# Altium PCB YB03CQ81552-(U).PcbDoc
Units mm, origin at the board's own origin, x right, y up, seen from the top; angles counter-clockwise.
Board outline 53 x 50 mm, 2 copper layers (Top Layer, Bottom Layer); 62 components, 79 nets, 283 pads, 106 vias.
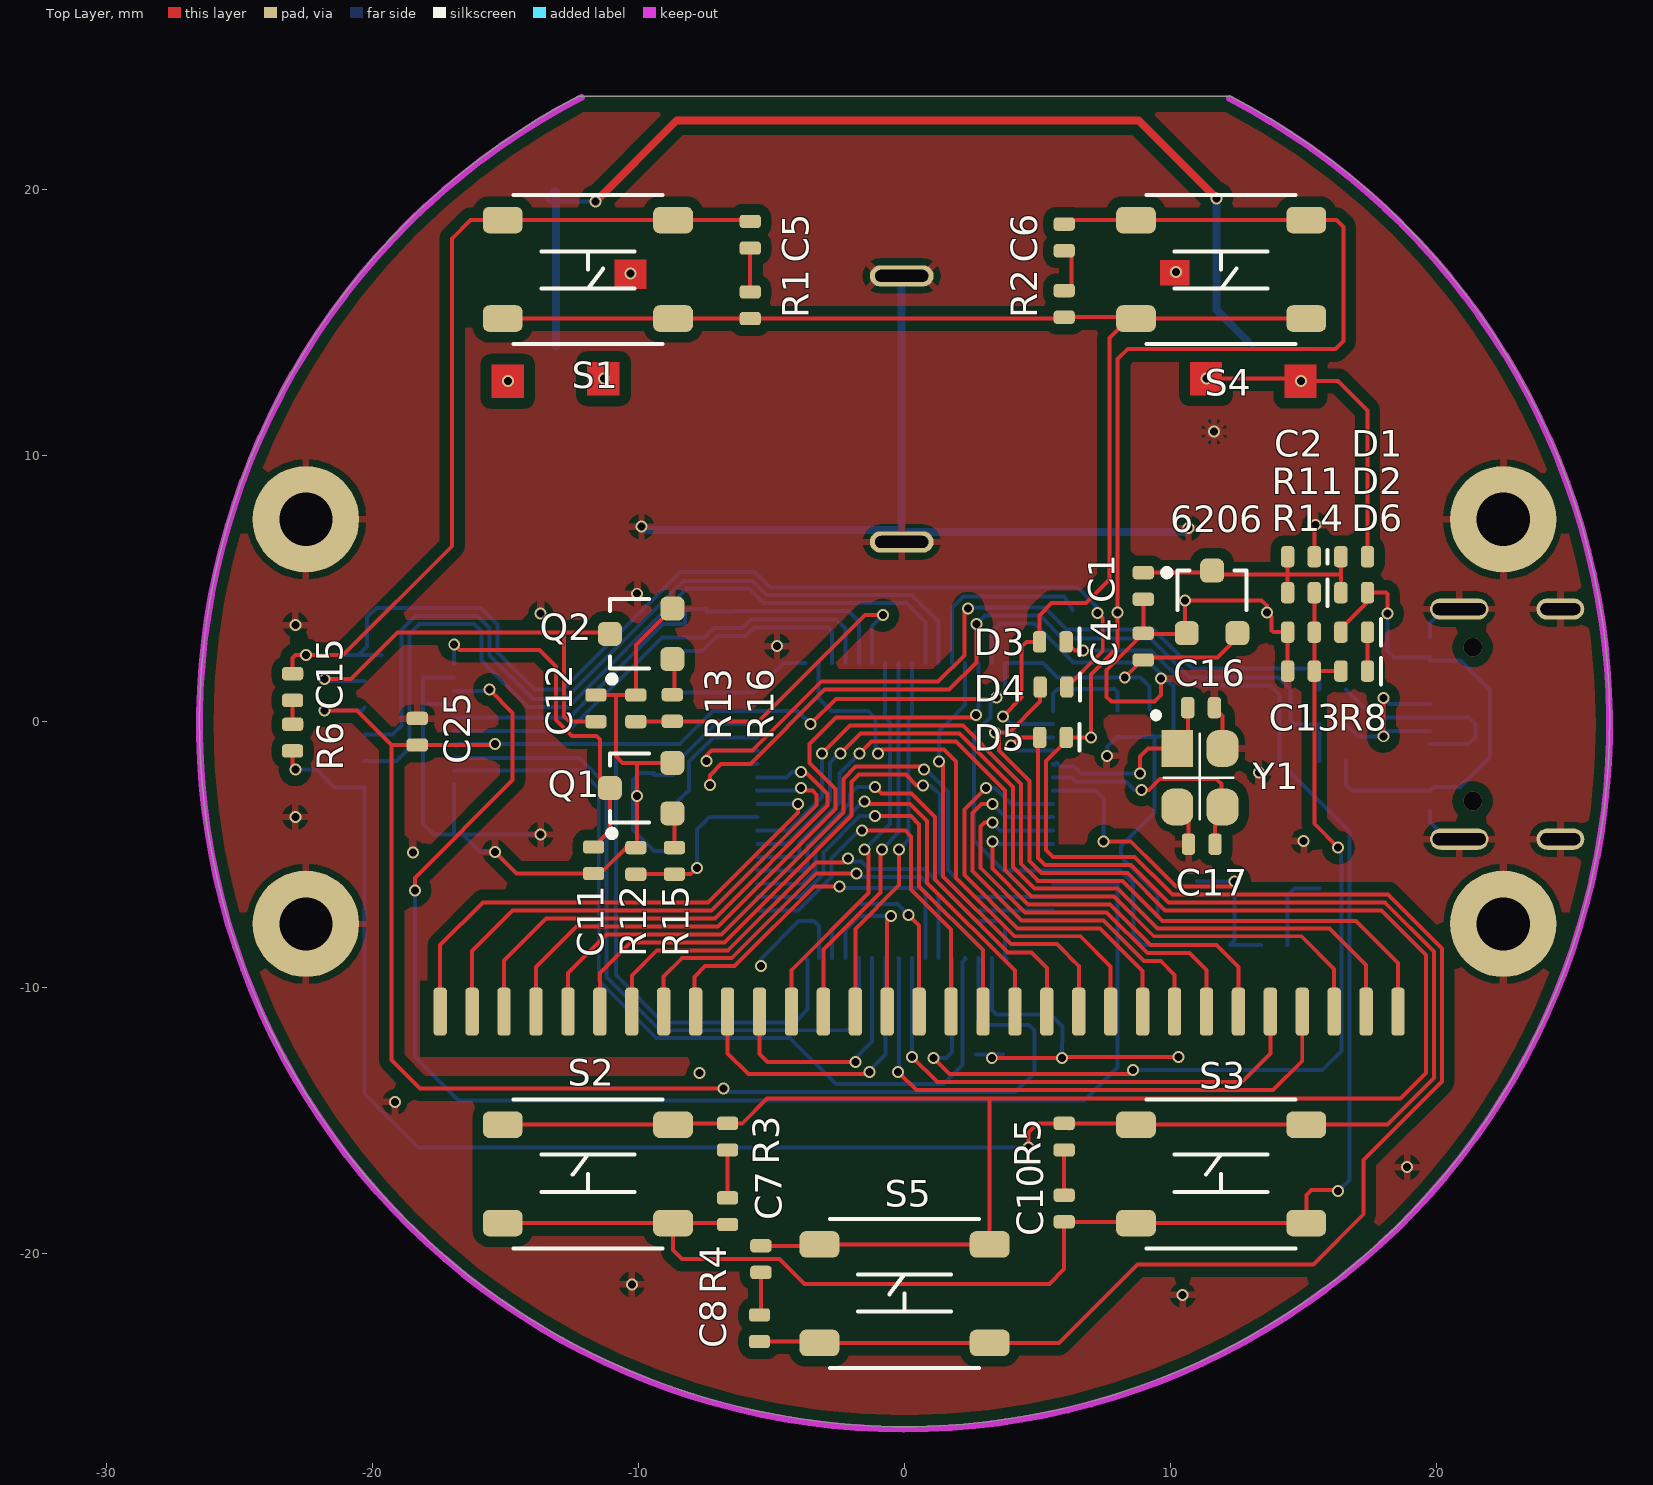
[diagram p0: Top Layer view]
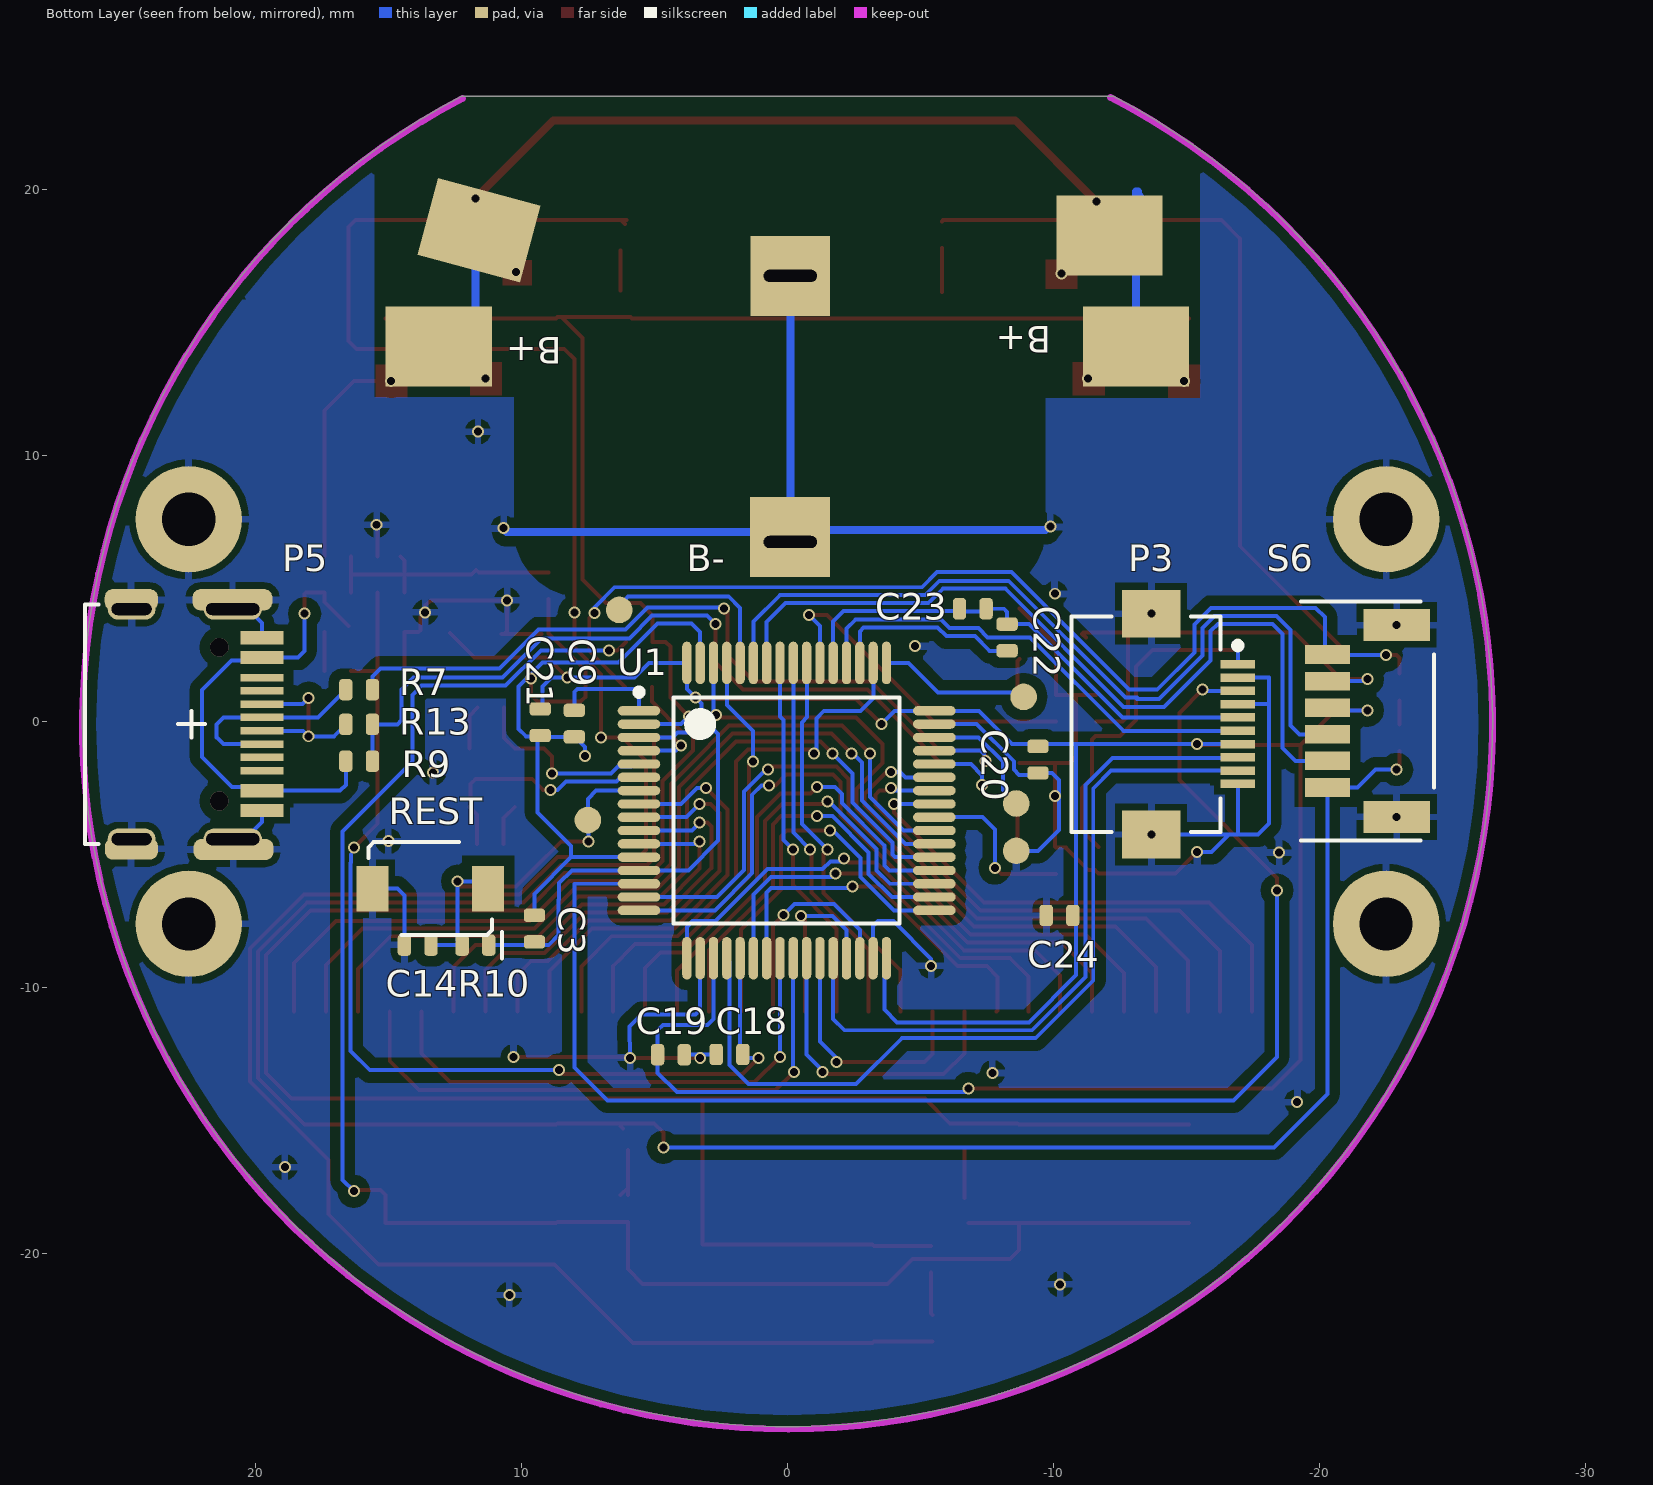
[diagram p1: Bottom Layer view, seen from below]

## Layer stack, top to bottom
Top Solder: solder mask 0.0102, Solder Resist, Dk 3.5
Top Layer: signal copper 0.0356
Dielectric 1: dielectric 0.32, FR-4, Dk 4.8
Bottom Layer: signal copper 0.0356
Bottom Solder: solder mask 0.0102, Solder Resist, Dk 3.5

## Board outline
-12.247,23.5 ccw(c0,0) 12.247,23.5

## Design rules (kind name [scope] priority, off if disabled: settings)
Clearance Clearance_1 [InNamedPolygon('Bottom Layer-GND') Or  InNamedPolygon('Bottom Layer-GND 1')] p1: gap=0.4 ignorepadtopadclearanceinfootprint=FALSE
Clearance [All] p2: gap=0.15 ignorepadtopadclearanceinfootprint=FALSE
PolygonConnect PolygonConnect_1 [All vs IsNamedPolygon('Bottom Layer-GND')] p1: connectstyle=Relief reliefconductorwidth=0.254 reliefentries=4 polygonreliefangle="45 Angle" airgapwidth=0.254
PolygonConnect [All] p2: connectstyle=Relief reliefconductorwidth=0.254 reliefentries=4 polygonreliefangle="90 Angle" airgapwidth=0.254
RoutingVias [All] p1: holewidth=0.711 width=1.27 viastyle="Through Hole" minholewidth=0.711 minwidth=1.27 maxholewidth=0.711 maxwidth=1.27
SolderMaskExpansion [All] p1: expansion=0.102
UnRoutedNet [All] p1: checkbadconnections=TRUE
Width [All] p1: maxlimit=2 minlimit=0.127 preferedwidth=0.15 checkconnectedcopper=TRUE
29 further rules are at their usual default settings.

## Components (designator, comment, footprint, x,y, rotation, side; value= is the part's Value field where it differs from the comment)
6206 "6206" sot-23 11.557,4.5 r0 top
C1 "Cap" S0402#1 8.972,5.1 r270 top value=.47
C2 "Cap" S0402#1 14.9,6.199 r180 top value=0.01
C3 "Cap" S0402#1 9.511,-7.778 r90 bottom value=0.01
C4 "Cap" S0402#1 8.972,2.82 r90 top value=0.47
C5 "Cap" S0402#1 -5.8,18.3 r90 top value=0.01
C6 "Cap" S0402#1 6,18.2 r90 top value=0.01
C7 "Cap" S0402#1 -6.652,-18.4 r270 top value=0.01
C8 "Cap" S0402#1 -5.452,-22.8 r270 top value=0.01
C9 "Cap" S0402#1 8.012,-0.074 r90 bottom value=.47
C10 "Cap" S0402#1 6,-18.3 r270 top value=0.01
C11 "Cap" S0402#1 -11.687,-5.211 r270 top value=0.01
C12 "Cap" S0402#1 -11.6,0.5 r90 top value=0.01
C13 "Cap" S0402#1 14.9,1.899 r180 top value=0.01
C14 "Cap" S0402#1 13.9,-8.4 r0 bottom value=0.1
C15 "Cap" S0402#1 -23,1.3 r90 top value=0.01
C16 "Cap" S0402#2 11.146,0.523 r0 top value=18P
C17 "Cap" S0402#1 11.171,-4.605 r180 top value=18P
C18 "Cap" S0402#1 2.178,-12.508 r180 bottom value=0.01
C19 "Cap" S0402#1 4.38,-12.52 r180 bottom value=0.01
C20 "Cap" S0402#1 -9.413,-1.43 r270 bottom value=0.01
C21 "Cap" S0402#1 9.295,-0.024 r90 bottom value=0.01
C22 "Cap" S0402#1 -8.256,3.164 r270 bottom value=0.01
C23 "Cap" S0402#1 -6.966,4.243 r0 bottom value=0.01
C24 "Cap" S0402#1 -10.225,-7.284 r0 bottom value=0.01
C25 "Cap" S0402#1 -18.316,-0.378 r270 top value=0.01 (schematic designator C7)
D1 "Diode 1N4148" D0603 16.9,6.199 r0 top
D2 "Diode 1N4148" D0603 16.9,4.845 r0 top
D3 "Diode" D0603 5.574,3 r180 top
D4 "Diode" D0603 5.6,1.3 r180 top
D5 "Diode" D0603 5.58,-0.593 r180 top
D6 "Diode" D0603 16.9,3.362 r180 top
P3 "Header 10" FH12-10S-0.5SH -15.3,-0.093 r270 bottom locked
P5 "Header 4" TYPE_C_16P_HK 22.4,-0.093 r180 bottom
Q1 "MOSFET-N" sot-23 -9.9,-2.5 r90 top
Q2 "MOSFET-N" sot-23 -9.9,3.3 r90 top
R1 "Res1" S0402#1 -5.8,15.65 r270 top value=10K
R2 "Res1" S0402#1 6,15.7 r270 top value=10K
R3 "Res1" S0402#1 -6.652,-15.6 r90 top value=10K
R4 "Res1" S0402#1 -5.4,-20.2 r90 top value=10K
R5 "Res1" S0402#1 6,-15.6 r90 top value=10K
R6 "Res1" S0402#1 -23,-0.6 r270 top value=10K
R7 "Res1" S0402#1 16.1,1.2 r180 bottom value=22R
R8 "Res1" S0402#1 16.9,1.899 r180 top value=1M
R9 "Res1" S0402#1 16.1,-1.488 r180 bottom value=2k
R10 "Res1" S0402#1 11.728,-8.4 r0 bottom value=10K
R11 "Res1" S0402#1 14.9,4.845 r0 top value=1M
R12 "Res1" S0402#1 -10.1,-5.236 r90 top value=10K
R13 "Res1" S0402#1 -10.1,0.5 r90 top value=10K
R13 "Res1" S0402#1 16.1,-0.1 r180 bottom value=22R
R14 "Res1" S0402#1 14.9,3.362 r180 top value=1M
R15 "Res1" S0402#1 -8.65,-5.236 r270 top value=100
R16 "Res1" S0402#1 -8.727,0.512 r270 top value=100
REST "Comment" 3*4*2KEY 11.25,-6.278 r0 bottom
S1 "TOL" 4*4*1 -11.9,17 r0 top
S2 "IN/MM(UP)" 4*4*1 -11.9,-17 r180 top locked
S3 "ABS/SET(DOWN)" 4*4*1 11.9,-17 r180 top locked
S4 "M" 4*4*1 11.9,17 r0 top
S5 "OFF/ZERO" 4*4*1 0,-21.5 r180 top locked
S6 "ABS_ZERO" SH1.0L-6P -20.3,2.523 r270 bottom locked
U1 "STM32L152RCT6" STM-LQFP64_N 0.03,-3.343 r180 bottom locked
Y1 "XTAL" "3225 4P XAL" 10.25,-1.01 r270 top locked

## Footprints (in the part's own frame and the unit in brackets; to place one, negate y for a bottom-side part, rotate by r counter-clockwise, add the part's x,y. Pads: shape width x height; smd on the part's side, far side on the other; paste and mask are expansions set on the pad)
3*4*2KEY [mm]
  rect 1.2x1.7 smd paste-0.2: 1(0,0) 2(4.35,0)
  silkscreen extent -0.15,-1.75 4.5,1.75
4*4*1 [mm]
  rrect50% 1.5x1 smd paste-0.15 mask+0.102: 1(-3.2,1.85) 1(3.2,1.85) 2(-3.2,-1.85) 2(3.2,-1.85)
  silkscreen extent -2.8,-2.8 2.8,2.8
"3225 4P XAL" [mm]
  rect 1.4x1.2 smd paste-0.15 mask+0.102: 1(0,0)
  rrect75% 1.4x1.2 smd paste-0.15 mask+0.102: 2(2.2,1.7) GND(0,1.7) GND(2.2,0)
  silkscreen extent -1.35,-0.9 2.65,2.1
D0603 [mm]
  rrect50% 0.5x0.8 smd paste-0.08: 1(0.5,0) 2(-0.5,0)
  silkscreen extent -1,-0.25 -1,0.25, body extent -0.55,-0.3 0.55,0.3, height 1.3
FH12-10S-0.5SH [mm] "Connector; FH12 Series; 10 Position; 0.5mm Spaced Bottom Contact"
  rect 0.32x1.3 smd paste-0.05: 1(-2.25,1.625) 2(-1.75,1.625) 3(-1.25,1.625) 4(-0.75,1.625) 5(-0.25,1.625) 6(0.25,1.625) 7(0.75,1.625) 8(1.25,1.625) 9(1.75,1.625) 10(2.25,1.625)
  rect 1.8x2.2 smd paste-0.2: 11(-4.15,-1.625) 12(4.15,-1.625)
  silkscreen extent -4.05,-4.63 4.05,1.75
S0402#1 [mm]
  rrect50% 0.5x0.8 smd paste-0.08: 1(0.5,0) 2(-0.5,0)
  body extent -0.55,-0.3 0.55,0.3, height 1.3
S0402#2 [mm]
  rrect50% 0.5x0.8 smd paste-0.08: 1(0.5,0)
  rrect50% 0.5x0.8 smd paste-0.15: 2(-0.5,0)
  body extent -0.55,-0.3 0.55,0.3, height 1.3
SH1.0L-6P [mm]
  rect 0.7x1.7 smd paste-0.1 mask+0: 1(0,0) 2(1,0) 3(2,0) 4(3,0) 5(4,0) 6(5,0)
  rect 1.2x2.5 smd paste-0.2 mask+0: G(-1.11,2.6) G(6.11,2.6)
  silkscreen extent -2,-1 7,4
sot-23 [mm] "SOT-23; 3 Leads; Body 3.0 x 2.5 mm, inc. leads (LxW max), Alternate Lead Configuration"
  rrect50% 0.9x0.9 smd paste-0.1: 1(0,1.175) 2(-0.95,-1.175) 3(0.95,-1.175)
  silkscreen extent -1.82,-0.3 1.3,1.22
STM-LQFP64_N [mm] "Thin QFP, 64-Leads, Body 10x10mm, Pitch 0.5mm, IPC Medium Density"
  oval 1.6x0.35 smd paste-0.08 mask+0.064: 1(-5.55,3.75) 2(-5.55,3.25) 3(-5.55,2.75) 4(-5.55,2.25) 6(-5.55,1.25) 7(-5.55,0.75) 8(-5.55,0.25) 9(-5.55,-0.25) 10(-5.55,-0.75) 11(-5.55,-1.25) 12(-5.55,-1.75) 13(-5.55,-2.25) 14(-5.55,-2.75) 15(-5.55,-3.25) 16(-5.55,-3.75) 33(5.55,-3.75) 34(5.55,-3.25) 35(5.55,-2.75) 36(5.55,-2.25) 37(5.55,-1.75) 38(5.55,-1.25) 39(5.55,-0.75) 40(5.55,-0.25) 41(5.55,0.25) 42(5.55,0.75) 43(5.55,1.25) 44(5.55,1.75) 45(5.55,2.25) 46(5.55,2.75) 47(5.55,3.25) 48(5.55,3.75)
  oval 1.6x0.35 smd paste-0.15 mask+0.064: 5(-5.55,1.75)
  oval 0.35x1.6 smd paste-0.08 mask+0.064: 17(-3.75,-5.55) 18(-3.25,-5.55) 19(-2.75,-5.55) 20(-2.25,-5.55) 21(-1.75,-5.55) 22(-1.25,-5.55) 23(-0.75,-5.55) 24(-0.25,-5.55) 25(0.25,-5.55) 26(0.75,-5.55) 27(1.25,-5.55) 28(1.75,-5.55) 29(2.25,-5.55) 30(2.75,-5.55) 31(3.25,-5.55) 32(3.75,-5.55) 49(3.75,5.55) 50(3.25,5.55) 51(2.75,5.55) 52(2.25,5.55) 53(1.75,5.55) 54(1.25,5.55) 55(0.75,5.55) 56(0.25,5.55) 57(-0.25,5.55) 58(-0.75,5.55) 59(-1.25,5.55) 60(-1.75,5.55) 61(-2.25,5.55) 62(-2.75,5.55) 63(-3.25,5.55) 64(-3.75,5.55)
  silkscreen extent -5.68,-4.25 4.25,4.57, body extent -5,-5 5,5, height 1.6
TYPE_C_16P_HK [mm] "汉科16P"
  rrect75% 2x0.8 smd paste+0 mask+0.102: 200(-2.263,4.671) 200(-2.26,-4.691)
  rrect75% 3x0.8 smd paste+0 mask+0.102: 200(1.538,4.671) 200(1.581,-4.709)
  rect 1.6x0.5 smd paste-0.1 mask+0.064: A1B12(2.65,3.25) A4B9(2.65,2.5) B4A9(2.65,-2.5)
  rect 1.6x0.28 smd paste-0.05 mask+0.064: A5(2.65,1.25) A6(2.65,0.25) A7(2.65,-0.25) A8(2.65,-1.25) B5(2.65,-1.75) B6(2.65,-0.75) B7(2.65,0.75) B8(2.65,1.75)
  rect 1.6x0.5 smd paste-0.1: B1A12(2.65,-3.25)
  oval 1.8x0.8 hole 0.45 slot 1.5 at 0 deg paste+0 mask+0.102: GND(-2.25,4.325) GND(-2.25,-4.325)
  oval 2.2x0.8 hole 0.45 slot 2 at 0 deg paste+0 mask+0.102: GND(1.55,4.325) GND(1.55,-4.325)
  silkscreen extent -4,-4.5 0.5,4.5

## Part data
6206: library part 2606
C1 C2 C3 C4 C5 C6 C7 C8 C9 C10 C11 C12 C13 C14 C15 C16 C17 C18 C19 C20 C21 C22 C23 C24 C25: "Capacitor", LatestRevisionDate=17-Jul-2002, LatestRevisionNote="Re-released for DXP Platform.", PackageDescription="Radial Cap, Thru-Hole; 2 Leads; 0.3 in Pin Spacing", PackageReference=RAD-0.3, Published=8-Jun-2000, Publisher="Altium Limited"
D1 D2: "High Conductance Fast Diode", Code_JEDEC=DO-204-AH, ComponentLink1Description="Manufacturer Link", ComponentLink1URL=http://www.fairchildsemi.com/, ComponentLink2Description=Datasheet, ComponentLink2URL=http://www.fairchildsemi.com/ds/1N%2F1N4148.pdf, DatasheetVersion=1997, LatestRevisionDate=17-Jul-2002, LatestRevisionNote="Re-released for DXP Platform.", PackageDescription="Diode, Axial; Body 3.8 x 1.9 mm (LxDia. max), Lead Dia. 0.53 mm (max)", PackageReference=DO-35, Published=8-Jun-2000, Publisher="Altium Limited"
D3 D4 D5 D6: "Default Diode", Code_JEDEC=DO-214-AB, LatestRevisionDate=17-Jul-2002, LatestRevisionNote="Re-released for DXP Platform.", PackageDescription="DO-214-AB/SMC; 2 C-Bend Leads; Body 7.9 x 5.9 mm, inc. leads (LxW)", PackageReference=SMC, PackageVersion=Sep-1996, Published=8-Jun-2000, Publisher="Altium Limited"
P3: "Header, 10-Pin", LatestRevisionDate=17-Jul-2002, LatestRevisionNote="Re-released for DXP Platform.", Publisher="Altium Limited"
P5: "Header, 4-Pin", LatestRevisionDate=17-Jul-2002, LatestRevisionNote="Re-released for DXP Platform.", Publisher="Altium Limited"
Q1 Q2: "N-Channel MOSFET", LatestRevisionDate=17-Jul-2002, LatestRevisionNote="Re-released for DXP Platform.", PackageDescription="TO, Flat Index; 3 In-Line, Axial Leads; Body Dia. 4.6mm; Lead Dia. 0.5 mm (max)", PackageReference=E3, PackageVersion=1995/1996, Published=8-Jun-2000, Publisher="Altium Limited"
R1 R2 R3 R4 R5 R6 R7 R8 R9 R10 R11 R12 R13 R13 R14 R15 R16: "Resistor", LatestRevisionDate=17-Jul-2002, LatestRevisionNote="Re-released for DXP Platform.", PackageDescription="Axial Device, Thru-Hole; 2 Leads; 0.3 in Pin Spacing", PackageReference=AXIAL-0.3, Published=8-Jun-2000, Publisher="Altium Limited"
S1 S2 S3 S4 S5: library part SW-PB, "Switch", LatestRevisionDate=17-Jul-2002, LatestRevisionNote="Re-released for DXP Platform.", PackageDescription="Switch; 2 Leads", PackageReference=SPST-2, Published=24-Mar-1999, Publisher="Altium Limited"
S6: library part SW-SPST, "Single-Pole, Single-Throw Switch", LatestRevisionDate=17-Jul-2002, LatestRevisionNote="Re-released for DXP Platform.", PackageDescription="Switch; 2 Leads", PackageReference=SPST-2, Published=24-Mar-1999, Publisher="Altium Limited"
U1: "ARM Cortex-M3 32-bit MCU, 256 KB Flash, 32 KB Internal RAM, 51 I/Os, 64-pin LQFP, -40 to 85 degC, Tray", I/Os (High Current)=51, Manufacturer=STMicroelectronics, Operating Frequency(F) (Processor speed) (MHz)=32, Supply Voltage(Vcc) min (V)=1.65, ComponentLink1Description="Manufacturer URL", ComponentLink1URL=http://www.st.com/web/en/home.html, ComponentLink2Description=Datasheet, ComponentLink2URL=http://www.st.com/st-web-ui/static/active/en/resource/technical/document/datasheet/DM00048356.pdf, ComponentLink3Description="Package Specification", ComponentLink3URL=http://www.st.com/st-web-ui/static/active/en/resource/technical/document/datasheet/DM00037051.pdf, Core="ARM Cortex-M3", D/A Converter="2x12-bit (2 Channel)", Data E2PROM nom (B)=8192, DatasheetVersion="Rev. 3", Display controller="LCD 4x32/8x28", FLASH Size (Prog) (kB)=256, Internal RAM Size (kB)=32, Mounting Technology="Surface Mount", PackageDescription="64-Pin Low Profile Quad Flat Package, 10 x 10 mm Body, 0.5 mm Pitch", PackageReference=LQFP64, PackageVersion="Rev. 4, 06/2013", Packing=Tray, PartNumber=STM32L152RCT6
Y1: "Crystal Oscillator", LatestRevisionDate=17-Jul-2002, LatestRevisionNote="Re-released for DXP Platform.", PackageDescription="Crystal, Thru-Hole; 2 Leads; Body 3.1 x 8.2 mm (Dia.xH)", PackageReference=R38, Published=8-Jun-2000, Publisher="Altium Limited"

## Free pads (board coordinates)
  rect 4x3 smd far side paste-0.3 mask+0.102: 2(-13.1,14.1) 2(-12.105,18.272) 2(13.1,14.1)
  rect 3x3 smd far side paste-2 mask+0.102: 2(-0.107,16.752) 2(-0.094,6.937)
  rect 3x4 smd far side rot 105 paste-0.3 mask+0.102: 2(11.591,18.47)
  round 4 hole 2 mask+0.102: 3(-22.5,7.603) 3(22.5,7.603) 6(22.5,-7.603)
  round 4 hole 2 paste-2 mask+0.102: 4(-22.5,-7.603)
  round 1 smd far side paste-2 mask+0.102: 8(7.5,-3.7) 9(-8.6,-4.858) 10(-8.6,-3.078) 11(-8.875,0.928) 12(6.321,4.199)
  oval 2.4x0.8 hole 0.45 slot 2 at 0 deg mask+0.102: 13(-0.107,6.752) 13(-0.107,16.752)
  rrect50% 0.5x1.8 smd paste-2 mask+0.102: COM0(-17.452,-10.9) COM1(-16.252,-10.9) COM2(-15.052,-10.9) COM3(-13.852,-10.9) S01(-12.652,-10.9) S01(-11.452,-10.9) S02(-10.252,-10.9) S03(-9.052,-10.9) S04(-7.852,-10.9) S05(-6.652,-10.9) S06(-5.452,-10.9) S07(-4.252,-10.9) S08(-3.052,-10.9) S09(-1.852,-10.9) S10(-0.652,-10.9) S11(0.548,-10.9) S12(1.748,-10.9) S13(2.948,-10.9) S14(4.148,-10.9) S15(5.348,-10.9) S16(6.548,-10.9) S17(7.748,-10.9) S18(8.948,-10.9) S19(10.148,-10.9) S20(11.348,-10.9) S21(12.548,-10.9) S22(13.748,-10.9) S23(14.948,-10.9) S24(16.148,-10.9) S25(17.348,-10.9) S26(18.548,-10.9)

## Via types
v1: diameter 0.45, hole 0.3, Top Layer to Bottom Layer, 104 vias
v2: diameter 0.7, hole 0.7, Top Layer to Bottom Layer, tented both sides, 2 vias

## Nets (pads, with @x,y where several pads share a name; then routed paths per layer and width w, separated by ;. In a path a pad name is that pad's centre, name@x,y a point inside that pad or via, vN(x,y) a via of type N, cw(c..) or ccw(c..) an arc to the next point about the centre after c; other vN are vias at no path point)
232_R: S6.4 U1.59 | length 31.4
  Bottom Layer w0.15: S6.4 -19.242,-0.477 -18.915,-0.149 -18.915,3.444 -18.384,3.975 -16.051,3.975 -15.6,3.524 -15.6,2.477 -13.973,0.85 -13.144,0.85 ; -13.144,0.9 -12.706,0.9 -8.311,5.295 -5.717,5.295 -5.173,4.751 0.286,4.751 1.28,3.756 U1.59
232_T: S6.5 U1.58 | length 31.6
  Bottom Layer w0.15: S6.5 -19.1,-1.477 -18.615,-0.991 -18.615,3.287 -18.227,3.675 -16.175,3.675 -15.9,3.4 -15.9,2.3 -14.15,0.55 -12.632,0.55 -8.187,4.995 -5.842,4.995 -5.298,4.451 0.067,4.451 0.78,3.737 U1.58
+2.8V: 6206.3 C3.2 C4.2 C19.2 C20.2 C21.1 C24.2 C25.1 P3.7 R10.2 S6.3 U1.13 U1.19 U1.32 U1.48 U1.64 | length 122.3
  Top Layer w0.15: v1(-21.8,0.426) -20.58,0.426 -19.277,-0.877 ; v1(-15.4,-0.843) -15.433,-0.877 -19.277,-0.877 ; v1(-6.802,-13.792) -18.208,-13.792 -19.277,-12.723 -19.277,-0.877 ; v1(-3.526,-0.093) -2.576,0.857 3.407,0.857 v1(3.45,0.9) ; v1(8.277,1.657) 9.027,2.407 11.761,2.407 6206.3@12.678,3.324
  Bottom Layer w0.15: v1(-21.8,0.426) -20.397,0.426 S6.3 ; P3.7 -16.858,-0.91 -16.791,-0.843 v1(-15.4,-0.843) -10.9,-0.843 ; v1(-6.802,-13.792) -6.669,-13.925 4.158,-13.925 4.88,-13.203 C19.2 4.88,-11.6 4.68,-11.4 3,-11.4 2.78,-11.18 U1.19 U1.19@2.88,-8.993 ; U1.32 -3.646,-8.967 -3.646,-10.829 -4.118,-11.3 -9.076,-11.3 -10.85,-9.526 -10.85,-0.893 -10.9,-0.843 ; v1(-3.526,-0.093) -4.026,0.407 U1.48 -7.199,0.407 -8.449,-0.843 -10.9,-0.843 ; C21.1@9.212,0.476 9.212,1.321 8.876,1.657 v1(8.277,1.657) 5.752,1.657 5.202,2.207 U1.64 3.78,1.23 v1(3.45,0.9) 3.225,0.675 3.225,0.152 2.604,-0.469 2.604,-4.476 3.722,-5.593 U1.13 8.104,-5.593 8.583,-6.073 8.583,-6.683 8.6,-6.7 8.6,-8.028 8.972,-8.4 R10.2
+3.3V: 6206.1 C1.2 C2.1 D1.2 D2.2 R11.2 | length 10.3
  Top Layer w0.15: C1.2 11.601,5.6 11.701,5.7 11.728,5.674 11.879,5.522 14.4,5.522 ; R11.2 14.4,5.522 ; C2.1@14.549,6.199 14.4,6.05 14.4,5.522 ; D2.2 16.4,5.522 ; D1.2 16.4,5.522 ; 14.4,5.522 16.4,5.522
+5.0V: D2.1 D6.1 P5.A4B9 P5.B4A9 R9.2 | length 18.5
  Top Layer w0.15: D6.1@16.5,3.599 17.4,4.499 D2.1 18.1,4.845 18.15,4.795 v1(18.15,4.057)
  Bottom Layer w0.15: R9.2 16.6,-2.377 16.817,-2.593 P5.B4A9 19.893,-2.45 20.874,-2.45 22,-1.324 22,1.193 20.893,2.3 19.75,2.3 P5.A4B9 18.4,2.407 18.15,2.657 v1(18.15,4.057)
+BATT: D1.1 pad.2@11.591,18.47 pad.2@13.1,14.1 pad.2@-12.105,18.272 pad.2@-13.1,14.1 | length 52.3
  Top Layer w0.15: v1@-11.4,12.8 v1(-11.3,12.9) ; v1(11.348,12.9) 14.8,12.9 v1(14.9,12.8) 16.3,12.8 17.4,11.7 D1.1
  Top Layer w0.3: v1(-11.607,19.552) -8.559,22.6 8.795,22.6 v1(11.728,19.668)
  Bottom Layer w0.15: -13.178,19.922 -13.448,19.652 -13.348,19.552 v1(-11.607,19.552) ; pad.2@12.9,14.3 pad.2@13.1,14.1
  Bottom Layer w0.3: -13.178,19.922 -13.1,19.922 pad.2@-13.1,14.1 ; v1(11.728,19.668) 11.728,15.472 pad.2@12.9,14.3
  other v1: -14.9,12.8 -10.307,16.842 10.2,16.9
BAT-V: C13.2 C18.1 R8.1 R11.1 R14.2 U1.21 | length 38.6
  Top Layer w0.15: v1(1.08,-12.649) 1.682,-13.25 8.433,-13.25 v1(8.583,-13.1) ; R11.1 C13.2 ; v1(16.3,-4.736) 15.4,-3.836 C13.2 ; R8.1 C13.2
  Bottom Layer w0.15: v1(1.08,-12.649) 1.551,-12.649 1.78,-12.42 U1.21 ; v1(8.583,-13.1) 15.7,-13.1 16.425,-12.375 16.425,-5.318 16.4,-5.293 16.4,-5
BOOT0: pad.12 U1.60 | length 7.1
  Bottom Layer w0.15: U1.60@1.8,2.226 U1.60 1.78,4.276 2.207,4.703 5.997,4.703 pad.12
CCO: 
COM0: pad.COM0 U1.41 | length 19.9
  Top Layer w0.15: pad.COM0 -17.452,-8.4 -15.845,-6.793 -7.381,-6.793 -4,-3.412 v1(-4,-3.1)
  Bottom Layer w0.15: U1.41 -4.007,-3.093 v1(-4,-3.1)
COM1: pad.COM1 U1.42 | length 20
  Top Layer w0.15: pad.COM1 -16.252,-8.618 -14.727,-7.093 -7.257,-7.093 -3.3,-3.136 -3.3,-2.75 -3.457,-2.593 -3.693,-2.593
  Bottom Layer w0.15: U1.42@-5.546,-2.567 U1.42 -3.993,-2.593 v1(-3.9,-2.5)
COM2: pad.COM2 U1.43 | length 20
  Top Layer w0.15: pad.COM2 -15.052,-8.972 -13.473,-7.393 -7.133,-7.393 -2.9,-3.161 -2.9,-2.726 -3.726,-1.9 v1(-3.9,-1.9)
  Bottom Layer w0.15: U1.43 -4.43,-2.093 -4.236,-1.9 v1(-3.9,-1.9)
COM3: pad.COM3 U1.62 | length 26.9
  Top Layer w0.15: pad.COM3 -13.852,-9.218 -12.327,-7.693 -7.008,-7.693 -2.6,-3.285 -2.6,-2.524 -3.565,-1.559 -3.565,-0.845 -2.571,0.15 2.587,0.15 v1(2.68,0.244)
  Bottom Layer w0.15: v1(2.68,0.244) 2.78,0.344 U1.62
GND: 6206.2 C1.1 C2.2 C3.1 C4.1 C9.2 C11.1 C12.1 C13.1 C14.1 C16.1 C17.1 C18.2 C19.1 C20.1 C21.2 C24.1 C25.2 P3.2 P3.4 P3.10 P3.11 P3.12 P5.200 P5.A1B12 P5.B1A12 P5.GND pad.2@-0.094,6.937 pad.2@-0.107,16.752 pad.3 pad.4 pad.6 pad.9 pad.13 Q1.3 Q2.3 R12.1 R13.1@-10.1,1 R14.1 REST.2 S6.G U1.12 U1.18 U1.31 U1.47 U1.63 Y1.GND | length 145.3
  Top Layer w0.15: v1(-15.4,-4.901) -14.59,-5.711 C11.1 -11.562,-5.586 -11.307,-5.586 -10.475,-4.754 -10.475,-4.736 R12.1 -10.05,-4.686 v1(-10.05,-2.8) -10.05,-1.55 ; C12.1 -10.871,1 ; Q1.3 -10.05,-1.55 ; Q2.3 -10.1,2.875 -10.1,1 -10.871,1 ; v1(3.278,-12.635) v1(5.918,-12.635) 6.02,-12.6 v1(10.3,-12.6) ; C1.1 C4.1 7.6,1.947 7.6,0.928 7.778,0.75 9.388,0.75 9.639,1 v1(9.639,1.624) ; C4.1@9.24,3.3 6206.2@10.754,3.3 ; Y1.GND@10.25,-3.21 10.671,-3.63 C17.1 ; 6206.2 10.535,3.397 v1(10.535,4.561) 13.41,4.561 13.616,4.356 v1(13.616,4.11) 13.788,3.938 13.788,3.432 13.859,3.362 R14.1 C13.1 C13.1@14.364,1.935 ; C16.1 11.95,0.219 Y1.GND@11.95,-1.01 ; C2.2 15.4,7.361 v1(15.439,7.4) ; -10.871,1 -10.85,0.979 -10.85,-1.3 -10.6,-1.55 -10.05,-1.55
  Bottom Layer w0.15: P3.10 -16.925,-4.243 ; P3.4 -18.057,0.657 -18.1,0.7 ; P3.2 -18.1,1.657 -18.1,0.7 ; v1(-15.4,-4.901) -15.943,-4.901 -16.6,-4.243 ; v1(-13.675,-4.243) -16.6,-4.243 ; C20.1@-9.413,-1.999 -8.7,-1.999 -8.507,-1.807 -8.507,-1.489 -7.111,-0.093 U1.47 ; C20.1 -9.937,-1.93 -10.207,-2.2 -10.207,-4.064 -9.413,-4.858 pad.9 ; v1(-5.4,-9.185) -5.4,-8.919 -3.981,-7.5 -3.4,-7.5 -3.22,-7.68 U1.31 ; pad.2@-0.107,7.2 -0.107,6.752 pad.13@0.267,7.126 ; C18.2 3.685,-12.508 C19.1@3.693,-12.5 ; U1.18 3.28,-10.83 3.45,-11 5.48,-11 5.94,-11.46 v1(5.918,-12.635) ; U1.63 3.28,3.362 3.6,3.682 4.893,3.682 6.351,2.223 9.203,2.223 10.113,1.313 10.113,-0.27 9.833,-0.55 C21.2@9.321,-0.55 ; U1.12 8.134,-5.093 ; v1(7.603,-1.289) 7.603,-0.953 7.983,-0.574 C9.2 9.295,-0.574 C21.2 C21.2@9.321,-0.55 ; C3.1 9.512,-6.471 8.134,-5.093 ; C14.1 14.4,-6.542 14.664,-6.278 REST.2 ; P5.B1A12 19.75,-3.777 20.391,-4.418 P5.GND@20.85,-4.418 ; P5.A1B12 19.75,3.7 20.282,4.232 P5.GND@20.85,4.232 ; -18.1,0.7 -18.1,-3.833 -17.689,-4.243 -16.925,-4.243 ; -16.925,-4.243 -16.6,-4.243 ; 8.134,-5.093 8.134,-4.675 9.4,-3.408 9.4,-0.629 C21.2@9.321,-0.55
  Bottom Layer w0.3: v1@-9.705,7.2 -0.107,7.2 pad.13@-0.107,16.752 ; pad.13@-0.094,6.937 pad.13@0.095,7.126 ; pad.13@0.267,7.126 v1@10.566,7.126
  other v1: 10.456,-21.548 -10.248,-21.148 18.893,-16.748 -19.157,-14.3 -7.707,-13.2 -18.481,-4.924 15.002,-4.492 -22.9,-3.587 13.314,-1.916 -4.794,2.836 -22.9,3.633 -13.675,4.057 -10.05,4.807 10.671,7.273 -9.887,7.327 11.634,10.9
K_P0: D3.1 R1.1 R2.1 S1.2 S4.2 U1.2 | length 50.2
  Top Layer w0.15: S1.2@-15.1,15.15 -8.7,15.15 R1.1 R2.1@5.85,15.15 ; v1(3.7,0.2) 4.4,0.9 4.4,2.82 4.58,3 D3.1 5.074,3.994 5.531,4.451 6.82,4.451 7.712,5.342 7.712,14.422 S4.2@8.49,15.2 ; R2.1@5.9,15.2 R2.1 S4.2@8.49,15.2 ; S4.2@15.1,15.15 8.7,15.15 8.65,15.2 S4.2@8.49,15.2
  Bottom Layer w0.15: v1(3.7,0.2) 3.993,-0.093 U1.2
K_P1: D4.1 R3.1 R4.1 S2.2 S5.2 U1.3 | length 80.8
  Top Layer w0.15: S2.2@-15.1,-15.15 -8.7,-15.15 -8.65,-15.1 R3.1 -6.1,-15.1 -5.168,-14.168 3.2,-14.168 ; R4.1 -3.25,-19.7 -3.2,-19.65 3.2,-19.65 3.2,-14.168 ; D4.1 5.1,0.75 3.95,-0.4 v1(3.4,-0.4) 3.55,-0.55 3.55,-1.086 3.814,-1.35 4.7,-2.236 4.7,-5.236 5.154,-5.69 8.39,-5.69 9.793,-7.093 17.925,-7.093 19.6,-8.768 19.6,-13.2 18.632,-14.168 3.2,-14.168
  Bottom Layer w0.15: v1(3.4,-0.4) 4.136,-0.4 4.33,-0.593 U1.3
K_P2: D5.1 R5.1 R6.1 S3.2 S6.6 U1.4 | length 86.3
  Top Layer w0.15: R6.1 -23,-1.7 v1(-22.9,-1.8) ; v1(4,-0.9) 4.307,-0.593 D5.1@5.012,-0.593 ; v1(4.667,-16) 4.667,-15.448 5.015,-15.1 R5.1 8.65,-15.1 8.7,-15.15 15.1,-15.15 18.15,-15.15 19.9,-13.4 19.9,-8.644 18.05,-6.793 9.918,-6.793 8.514,-5.39 5.278,-5.39 5.012,-5.124 D5.1@5.012,-0.593 ; D5.1 D5.1@5.012,-0.593 ; R5.1@6.181,-15.3 R5.1@6.281,-15.2
  Bottom Layer w0.15: v1(-22.9,-1.8) -22.1,-1.8 -21.423,-2.477 S6.6 -20.3,-13.992 -18.292,-16 v1(4.667,-16) ; v1(4,-0.9) 4.193,-1.093 U1.4
NetC5_1: C5.1 C15.1 D4.2 S1.1 S6.1 | length 71.3
  Top Layer w0.15: C15.1 -23,2.4 -22.9,2.5 v1(-22.5,2.5) -21.1,2.5 -17,6.6 -17,18.167 -16.317,18.85 -15.1,18.85 -8.7,18.85 -5.85,18.85 C5.1 ; D4.2 7.45,2.65 7.45,3.886 v1(7.261,4.075)
  Bottom Layer w0.15: v1(-22.5,2.5) S6.1@-20.517,2.5 ; S6.1@-19.65,2.5 S6.1@-20.517,2.5 ; v1(7.261,4.075) 7.261,4.284 6.495,5.051 -5.049,5.051 -5.616,5.617 -8.413,5.617 -12.83,1.2 -13.898,1.2 -15.3,2.602 -15.3,3.649 -15.926,4.275 -19.849,4.275 -20.2,3.924 -20.2,2.817 S6.1@-20.517,2.5
NetC5_2: C5.2 R1.2 | length 1.6
  Top Layer w0.15: R1.2 C5.2
NetC6_1: C6.1 C8.1 D5.2 S4.1 S5.1 | length 96.3
  Top Layer w0.15: C8.1 -3.25,-23.3 -3.2,-23.35 3.2,-23.35 5.798,-23.35 8.748,-20.4 15.366,-20.4 17.25,-18.516 17.25,-16.474 20.2,-13.524 20.2,-8.519 18.174,-6.493 10.072,-6.493 9.325,-5.747 9.295,-5.747 8.638,-5.09 5.58,-5.09 5.312,-4.822 5.312,-1.488 6.1,-0.7 6.1,-0.593 6.107,-0.6 v1(7,-0.6) 7,1.776 8.012,2.787 v1(8.012,4.1) 8.012,13.622 8.39,14 16.2,14 16.5,14.3 16.5,18.593 16.243,18.85 15.1,18.85 8.7,18.85 C6.1@6.256,18.85 ; C6.1@6.05,18.85 C6.1@6.256,18.85 ; C6.1@6.106,18.7 C6.1@6.256,18.85
NetC6_2: C6.2 R2.2 | length 1.5
  Top Layer w0.15: R2.2@6.281,16.2 C6.2@6.281,17.7
NetC7_1: C7.1 C10.1 D3.2 S2.1 S3.1 | length 66.8
  Top Layer w0.15: S2.1@-15.1,-18.85 S2.1@-8.7,-18.85 ; C7.1@-6.802,-18.85 S2.1@-8.7,-18.85 ; D3.2 6.398,2.677 v1(6.714,2.677) ; v1(16.3,-17.65) 16.25,-17.6 15.3,-17.6 15.1,-17.8 15.1,-18.85 8.7,-18.85 8.65,-18.8 C10.1 6,-20.58 5.445,-21.135 -3.765,-21.135 -4.7,-20.2 -8.359,-20.2 -8.7,-19.859 S2.1@-8.7,-18.85
  Bottom Layer w0.15: v1(6.714,2.677) 9.266,2.677 10.592,1.35 13.75,1.35 14.1,1 14.1,-1.5 16.725,-4.125 16.725,-17.225 v1(16.3,-17.65)
NetC7_2: C7.2 R3.2 | length 1.8
  Top Layer w0.15: C7.2 R3.2
NetC8_2: C8.2 R4.2 | length 1.6
  Top Layer w0.15: C8.2 -5.4,-22.248 R4.2
NetC9_1: C9.1 U1.1 | length 3.9
  Bottom Layer w0.15: U1.1 5.58,1.05 5.765,1.235 7.9,1.235 8.012,1.123 C9.1
NetC10_2: C10.2 R5.2 | length 3
  Top Layer w0.15: C10.2 6,-17.519 ; R5.2 6,-16.581 ; C10.2@6.281,-17.8 6,-17.519 ; 6,-17.519 5.989,-17.508 5.989,-16.592 6,-16.581 ; 6,-17.519 6,-16.581
NetC15_2: C15.2 R6.2 | length 0.9
  Top Layer w0.15: R6.2 C15.2
NetD6_2: D6.2 R8.2 | length 1.5
  Top Layer w0.15: R8.2 D6.2
NetP5_2: P5.A7 P5.B7 R13.2@16.6,-0.1 | length 6.7
  Top Layer w0.15: v1(18,-0.55) v1(18,0.88)
  Bottom Layer w0.15: R13.2@16.6,-0.1 17.05,-0.55 v1(18,-0.55) 18.207,-0.343 P5.A7 ; v1(18,0.88) 18.224,0.657 P5.B7
NetP5_3: P5.A6 P5.B6 R7.2 | length 7.7
  Bottom Layer w0.15: R7.2 17.643,0.157 P5.A6 21.193,0.157 21.457,-0.107 21.457,-0.593 21.443,-0.593 21.193,-0.843 P5.B6
NetQ1_2: Q1.2 R15.2 | length 1.3
  Top Layer w0.15: Q1.2 -8.65,-3.525 R15.2
NetQ2_2: Q2.2 R16.2 | length 1.4
  Top Layer w0.15: Q2.2 -8.65,2.275 R16.2@-8.65,1
NRST: C14.2 pad.8 R10.1 REST.1 U1.7 | length 14.5
  Top Layer w0.15: v1(7.484,-4.5) 8.503,-4.5 9.541,-5.539 9.625,-5.618 10.2,-6.193 12.4,-6.193 v1(12.4,-6)
  Bottom Layer w0.15: U1.7 7.193,-2.593 7.5,-2.9 pad.8 7.484,-3.716 v1(7.484,-4.5) ; REST.1@11,-6 v1(12.4,-6) 12.4,-8.228 R10.1 C14.2
S00: pad.S01@-12.652,-10.9 U1.15 | length 27.4
  Top Layer w0.15: pad.S01@-12.652,-10.9 -12.652,-9.452 -11.193,-7.993 -6.884,-7.993 -2.3,-3.409 -2.3,-2.148 -1.842,-1.691 0.627,-1.691 v1(0.736,-1.8)
  Bottom Layer w0.15: v1(0.736,-1.8) 0.808,-1.8 1.632,-2.624 1.632,-5.571 2.654,-6.593 U1.15
S01: pad.S01@-11.452,-10.9 U1.16 | length 26.1
  Top Layer w0.15: pad.S01@-11.452,-10.9 -11.452,-9.452 -10.293,-8.293 -6.76,-8.293 -2,-3.533 -2,-3.185 -2,-2.273 -1.718,-1.991 0.047,-1.991 0.456,-2.4 v1(0.7,-2.4)
  Bottom Layer w0.15: v1(0.7,-2.4) 0.983,-2.4 1.332,-2.749 1.332,-5.695 2.73,-7.093 U1.16
S02: pad.S02 U1.17 | length 19.5
  Top Layer w0.15: pad.S02 -10.252,-9.536 -9.309,-8.593 -6.636,-8.593 -3.336,-5.293 -2.3,-5.293 v1@-2.15,-5.143
  Bottom Layer w0.15: v1@-2.15,-5.143 v1@-2.137,-5.156 ; v1(-2.125,-5.143) -2.018,-5.25 -1.614,-5.25 -1.326,-5.538 0.747,-5.538 2.709,-7.5 3.561,-7.5 3.78,-7.719 U1.17 U1.17@3.83,-8.943
S03: pad.S03 U1.22 | length 16
  Top Layer w0.15: pad.S03 -9.052,-9.586 -8.359,-8.893 -6.511,-8.893 -3.318,-5.7 v1(-1.8,-5.7)
  Bottom Layer w0.15: v1(-1.8,-5.7) -1.8,-5.776 -1.738,-5.838 0.623,-5.838 1.28,-6.495 U1.22
S04: pad.S04 U1.23 | length 14
  Top Layer w0.15: pad.S04 -7.9,-10.852 -7.9,-9.6 -7.493,-9.193 -6.387,-9.193 -3.394,-6.2 v1(-2.45,-6.2)
  Bottom Layer w0.15: v1(-2.45,-6.2) -2.4,-6.25 0.611,-6.25 0.78,-6.42 U1.23
S05: pad.S05 U1.26 | length 11.8
  Top Layer w0.15: pad.S05 -6.652,-12.465 -5.867,-13.25 -1.45,-13.25 v1@-1.3,-13.1
  Bottom Layer w0.15: v1@-1.3,-13.1 -0.72,-12.52 U1.26
  other v1: -1.314,-13.175
S06: pad.S06 U1.27 | length 9.5
  Top Layer w0.15: pad.S06 -5.452,-12.5 -5.152,-12.8 -2.003,-12.8 v1@-1.852,-12.649
  Bottom Layer w0.15: v1(-1.852,-12.8) v1@-1.776,-12.724 ; v1@-1.852,-12.649 -1.22,-12.017 U1.27
S07: pad.S07 U1.55 | length 14.9
  Top Layer w0.15: pad.S07 -4.252,-9.344 -1.35,-6.442 -1.35,-4.95 v1(-1.5,-4.8)
  Bottom Layer w0.15: v1(-1.5,-4.8) -0.55,-3.85 -0.55,-0.024 -0.741,0.167 -0.741,2.186 U1.55
S08: pad.S08 U1.56 | length 14.3
  Top Layer w0.15: pad.S08 -3.052,-8.568 -0.9,-6.417 v1@-0.9,-4.8
  Bottom Layer w0.15: v1@-0.9,-4.8 v1@-0.875,-4.775 ; v1(-0.85,-4.8) -0.22,-4.17 U1.56
S09: pad.S09 U1.57 | length 14
  Top Layer w0.15: pad.S09 -1.852,-7.793 -0.2,-6.141 v1@-0.2,-4.9
  Bottom Layer w0.15: v1@-0.2,-4.9 -0.2,-4.871 v1@-0.164,-4.836 ; v1(-0.2,-4.8) 0.142,-4.458 0.142,0.062 0.28,0.2 U1.57
S10: pad.S10 U1.29 | length 6.7
  Top Layer w0.15: pad.S10 -0.652,-7.452 v1(-0.5,-7.3)
  Bottom Layer w0.15: U1.29 -2.22,-7.825 -1.695,-7.3 v1(-0.5,-7.3)
S11: pad.S11 U1.30 | length 8.3
  Top Layer w0.15: v1(0.148,-7.268) 0.548,-7.668 pad.S11
  Bottom Layer w0.15: U1.30 -2.72,-7.825 -1.745,-6.85 -0.27,-6.85 v1(0.148,-7.268)
S12: pad.S12 U1.33 | length 14.7
  Top Layer w0.15: v1(-1.6,-4.1) 0.037,-4.1 0.25,-4.313 0.25,-5.086 0.25,-6.314 1.748,-7.812 pad.S12
  Bottom Layer w0.15: U1.33 -3.998,-7.093 -2.75,-5.845 -2.75,-5.132 -1.718,-4.1 v1(-1.6,-4.1)
S13: pad.S13 U1.34 | length 16
  Top Layer w0.15: v1(-1.117,-3.55) 0.239,-3.55 0.55,-3.861 0.55,-5.211 0.55,-6.189 2.948,-8.588 pad.S13
  Bottom Layer w0.15: U1.34 -3.922,-6.593 -3.05,-5.721 -3.05,-4.914 -1.686,-3.55 v1(-1.117,-3.55)
S14: pad.S14 U1.35 | length 17.1
  Top Layer w0.15: v1@-1.6,-2.9 v1(-1.5,-3) -1.4,-3.1 0.214,-3.1 0.85,-3.736 0.85,-5.335 0.85,-6.062 4.148,-9.36 pad.S14
  Bottom Layer w0.15: U1.35 -3.846,-6.093 -3.35,-5.597 -3.35,-4.789 -1.6,-3.039 v1@-1.6,-2.9
S15: pad.S15 U1.36 | length 18.6
  Top Layer w0.15: v1(-1.117,-2.45) -0.867,-2.7 0.264,-2.7 1.15,-3.586 1.15,-5.459 1.15,-5.937 3.891,-8.679 4.766,-8.679 5.348,-9.261 pad.S15
  Bottom Layer w0.15: U1.36 -3.843,-5.593 -3.65,-5.4 -3.65,-4.665 -2.05,-3.065 -2.05,-2.714 -1.786,-2.45 v1(-1.117,-2.45)
S16: pad.S16 U1.61 | length 17.2
  Top Layer w0.15: v1(1.3,-1.5) 1.45,-1.65 1.45,-5.583 1.45,-5.813 4.004,-8.367 5.73,-8.367 6.548,-9.185 6.548,-9.188 ; 6.227,-8.867 6.548,-9.188 ; pad.S16 6.548,-9.188
  Bottom Layer w0.15: v1(1.3,-1.5) 1.3,-0.357 2.28,0.623 U1.61
S17: pad.S17 U1.50 | length 21.6
  Top Layer w0.15: v1(-1,-1.2) -0.85,-1.05 1.486,-1.05 1.93,-1.494 1.93,-5.869 4.128,-8.067 6.615,-8.067 7.748,-9.2 pad.S17
  Bottom Layer w0.15: U1.50 -3.238,2.188 -3.238,0.886 -2.746,0.395 -1.364,0.395 -1.091,0.122 -1.091,-1.109 v1(-1,-1.2)
S18: pad.S18 U1.8 | length 16.1
  Top Layer w0.15: v1(3.054,-2.5) 2.25,-3.304 2.25,-5.765 4.252,-7.767 7.345,-7.767 8.948,-9.37 pad.S18
  Bottom Layer w0.15: v1(3.054,-2.5) 3.4,-2.5 3.993,-3.093 U1.8
S19: pad.S19 U1.9 | length 16.2
  Top Layer w0.15: v1(3.3,-3.1) 2.885,-3.1 2.55,-3.435 2.55,-5.617 4.4,-7.467 7.47,-7.467 9.003,-9 9.63,-9 10.148,-9.518 pad.S19
  Bottom Layer w0.15: v1(3.3,-3.1) 3.793,-3.593 U1.9
S20: pad.S20 U1.10 | length 16.1
  Top Layer w0.15: v1(3.3,-3.8) 3,-3.8 2.85,-3.95 2.85,-5.492 4.524,-7.167 7.594,-7.167 9.127,-8.7 10.715,-8.7 11.348,-9.333 pad.S20
  Bottom Layer w0.15: v1(3.3,-3.8) 3.593,-4.093 U1.10
S21: pad.S21 U1.11 | length 15.8
  Top Layer w0.15: v1(3.3,-4.5) 3.3,-5.518 4.649,-6.867 7.718,-6.867 9.251,-8.4 11.728,-8.4 12.548,-9.221 pad.S21
  Bottom Layer w0.15: v1(3.3,-4.5) 3.393,-4.593 U1.11
S22: pad.S22 U1.24 | length 19.6
  Top Layer w0.15: v1(0.28,-12.6) 1.23,-13.55 12.68,-13.55 13.748,-12.482 pad.S22
  Bottom Layer w0.15: v1(0.28,-12.6) U1.24
S23: pad.S23 U1.25 | length 22
  Top Layer w0.15: v1@-0.2,-13.2 0.45,-13.85 13.85,-13.85 14.948,-12.752 pad.S23
  Bottom Layer w0.15: U1.25 -0.2,-8.913 v1@-0.2,-13.2
  other v1: -0.238,-13.175
S24: pad.S24 U1.37 | length 31.3
  Top Layer w0.15: v1(-1.7,-1.2) -1.25,-0.75 0.341,-0.75 1.941,-0.75 3.441,-2.25 3.78,-2.589 3.78,-5.574 4.773,-6.567 7.867,-6.567 9.367,-8.067 14.915,-8.067 16.148,-9.3 pad.S24
  Bottom Layer w0.15: U1.37 -4.043,-5.093 -3.95,-5 -3.95,-4.541 -2.45,-3.041 -2.45,-1.95 v1(-1.7,-1.2)
S25: pad.S25 U1.38 | length 32.5
  Top Layer w0.15: v1(-2.4,-1.2) -1.65,-0.45 0.465,-0.45 2.065,-0.45 3.565,-1.95 4.08,-2.465 4.08,-5.466 4.893,-6.278 8.012,-6.278 9.511,-7.778 15.978,-7.778 17.348,-9.148 pad.S25
  Bottom Layer w0.15: U1.38 -4.433,-4.593 -2.8,-2.961 -2.8,-1.536 v1@-2.431,-1.167
S26: pad.S26 U1.39 | length 33.9
  Top Layer w0.15: v1(-3.1,-1.2) -2.05,-0.15 0.589,-0.15 2.189,-0.15 3.689,-1.65 4.38,-2.341 4.38,-5.341 5.012,-5.973 ; 5.004,-5.982 5.012,-5.99 8.187,-5.99 9.687,-7.49 16.966,-7.49 18.548,-9.072 pad.S26
  Bottom Layer w0.15: U1.39 -4.357,-4.093 -3.1,-2.836 v1(-3.1,-1.2)
S27: 
S-GND: 
S_CLK: C22.2 C23.1 C23.2 P3.5 U1.53 | length 18.9
  Bottom Layer w0.15: P3.5 -12.584,0.157 -9.077,3.664 C22.2 -8.256,4.119 -8.132,4.243 C23.2 ; C23.2@-7.448,4.146 -6.448,4.146 -6.374,4.151 -2.114,4.151 -1.72,3.757 U1.53
S_CLK2: C22.1 U1.51 | length 7.1
  Bottom Layer w0.15: C22.1 -7.601,2.664 -7.052,3.212 -5.974,3.212 -5.648,3.538 -2.866,3.538 -2.72,3.392 U1.51
S_GND: C11.2 P3.1 Q1.1 | length 13.3
  Top Layer w0.15: v1(-16.925,2.9) -16.725,2.7 -13.725,2.7 -13.1,2.075 -13.1,0.061 -12.491,-0.548 -11.571,-0.548 -11.452,-0.667 -11.452,-2.123 Q1.1 -11.075,-4.098 C11.2
  Bottom Layer w0.15: P3.1 v1(-16.925,2.9)
S_INMM: P3.9 U1.20 | length 32.6
  Bottom Layer w0.15: P3.9 -12.157,-1.843 -11.493,-2.507 -11.493,-9.731 -9.324,-11.9 -4.304,-11.9 -2.579,-13.625 1.456,-13.625 2.18,-12.901 2.18,-9.034 2.301,-8.914 U1.20
S_MISO: P3.6 U1.52 | length 17.9
  Bottom Layer w0.15: P3.6 -12.623,-0.343 -9.114,3.166 -7.523,3.166 -7.176,3.512 -6.098,3.512 -5.772,3.838 -2.566,3.838 -2.22,3.492 U1.52
S_POWER: R12.2 R15.1 U1.40 | length 6.3
  Top Layer w0.15: R12.2 -8.036,-5.736 v1(-7.8,-5.5)
  Bottom Layer w0.15: v1(-7.8,-5.5) -7.8,-4.057 -7.337,-3.593 U1.40
S_ZERO: P3.8 U1.28 | length 26.1
  Bottom Layer w0.15: P3.8 -16.908,-1.36 -12.216,-1.36 -11.193,-2.382 -11.193,-9.607 -9.2,-11.6 -2.137,-11.6 -1.72,-11.182 U1.28
SWCLK: pad.11 U1.49 | length 5.7
  Bottom Layer w0.15: pad.11 -8.705,1.098 -5.661,1.098 -4.553,2.207 U1.49
SWDIO: pad.10 U1.46 | length 4.7
  Bottom Layer w0.15: pad.10 -8.1,-2.578 -8.1,-1.506 -7.187,-0.593 U1.46
TIM5_CH1: P3.3 U1.14 | length 54.1
  Top Layer w0.15: v1@-18.3,-6.442 v1(-18.4,-6.342) -18.4,-5.873 -14.727,-2.2 -14.727,0.327 v1(-15.6,1.2)
  Bottom Layer w0.15: v1(-18.4,-6.342) -18.4,-12.6 -16.758,-14.242 6.758,-14.242 8,-13 8,-6.093 U1.14 ; P3.3 v1@-15.6,1.157
USB_DM: R9.1 R13.1@15.6,-0.1 U1.44 | length 32.7
  Top Layer w0.15: v1(-7.319,-2.377) -7.319,-2.019 -6.893,-1.593 -5.795,-1.593 -3.002,1.2 1.67,1.2 2.7,2.23 v1(2.7,3.661)
  Bottom Layer w0.15: v1(-7.319,-2.377) -7.319,-2.019 -6.893,-1.593 U1.44 ; v1(2.7,3.661) 3.021,3.982 5.085,3.982 5.94,3.127 9.24,3.127 10.717,1.65 14.05,1.65 14.5,1.2 14.5,0.062 14.662,-0.1 15.6,-0.1 R9.1
USB_DP: R7.1 U1.45 | length 30.1
  Top Layer w0.15: v1(-7.443,-1.488) -7.443,-1.274 -7.263,-1.093 -5.723,-1.093 -3.13,1.5 1.26,1.5 2.25,2.49 2.25,4.109 v1@2.308,4.167 ; v1@2.3,4.175 v1@2.308,4.167 ; v1@2.308,4.167 2.393,4.082 v1(2.393,4.252) v1@2.308,4.167
  Bottom Layer w0.15: -7.385,-1.215 -7.263,-1.093 U1.45 ; v1@2.604,4.282 5.268,4.282 6.083,3.467 9.353,3.467 10.82,2 15.3,2 15.6,1.7 R7.1
W-POWER: 
W_GND: C12.2 Q2.1 S6.2 | length 17.6
  Top Layer w0.15: v1(-21.8,1.6) -20.8,1.6 -19.05,3.35 -12.8,3.35 ; C12.2 -12.6,0 -12.8,0.2 -12.8,3.35 ; Q2.1@-11.219,3.156 Q2.1 -11.125,3.35 -12.8,3.35
  Bottom Layer w0.15: v1(-21.8,1.6) -21.723,1.523 S6.2
W_POWER: R13.2@-10.1,0 R16.1 U1.54 | length 13
  Top Layer w0.15: R13.2@-10.1,0 R16.1@-8.65,0 ; R16.1 -8.307,0.012 -8.295,0 -5.481,0 -1.481,4.001 v1(-0.817,4.001)
  Bottom Layer w0.15: U1.54 -1.22,3.598 v1(-0.817,4.001)
X_IN: C16.2 U1.5 Y1.1 | length 7.4
  Top Layer w0.15: v1(8.851,-1.95) 8.851,-1.317 9.158,-1.01 Y1.1 10.646,-0.614 C16.2
  Bottom Layer w0.15: U1.5 5.617,-1.63 5.711,-1.536 5.868,-1.693 6.371,-1.693 6.628,-1.95 v1(8.851,-1.95)
X_OUT: C17.2 U1.6 Y1.2 | length 9
  Top Layer w0.15: v1(8.9,-2.562) 9.179,-2.562 9.593,-2.148 11.717,-2.148 11.91,-2.341 Y1.2@11.91,-3.046 ; C17.2 11.671,-3.489 Y1.2
  Bottom Layer w0.15: U1.6 6.271,-2.093 6.428,-2.25 8.323,-2.25 8.635,-2.562 v1(8.9,-2.562)
pads on no net: P5.A5 P5.A8 P5.B5 P5.B8
copper on no net:
  other v2: 21.35,-2.983 21.35,2.797

## Polygon pours and split planes (outlines as drawn)
GND on Bottom Layer "Bottom Layer-GND" (solid, pour order 3): -21.112,15.848 -17.148,15.848 21.112,15.848 ccw(c0.001,0.001) 12.957,23 -12.957,23 ccw(c0,0)
GND on Bottom Layer "Bottom Layer-GND 1" (solid, pour order 2): -20.96,16.048 ccw(c0,0) 26.398,0 ccw(c0,0) 21.112,15.848 -17.552,15.848 -17.695,16.048
GND on Top Layer "Bottom Layer-GND 1" (solid, remove dead copper, pour order 9): -20.961,16.011 ccw(c-0.001,-0.038) 26.397,-0.038 ccw(c-0.001,-0.038) 21.111,15.811 -17.553,15.811 -17.697,16.011
GND on Top Layer "Bottom Layer-GND" (solid, pour order 7): -21.155,15.7 -17.148,15.7 -17.148,9.364 24.436,9.364 ccw(c-0.244,0.002) 12.887,22.9 -13.066,22.9 ccw(c0.066,0.001)

## Keep-outs
Keep-Out Layer:
  lines w0.254: -12.142,23.461 ccw(c0,-0.093) 12.219,23.422

## Other copper
Top Layer:
  rectangle net +BATT: 14.273,12.163 15.493,13.421
  rectangle net +BATT: 10.721,12.263 11.941,13.521
  rectangle net +BATT: -11.927,12.263 -10.707,13.521
  rectangle net +BATT: -15.527,12.163 -14.307,13.421
  rectangle net +BATT: 9.593,16.387 10.711,17.352
  rectangle net +BATT: -10.907,16.252 -9.707,17.37
  pour cut-out: -18.227,-9.731 -18.227,-12.616 19.5,-12.616 19.5,-9.5
  pour cut-out: -30.9,-10.3
  pour cut-out: -16.25,-15.234 -16.25,-18.85 -6.652,-18.85 -6.652,-15.1
  pour cut-out: -16.908,18.602 -16.908,14.8 -6.466,14.8 -6.466,18.593
  pour cut-out: 6.479,18.575 6.479,15.5 15.968,15.5 15.968,18.47
Bottom Layer:
  pour cut-out: 10.434,15.413 10.434,21.147 ccw(c7.869,21.147) 7.869,23.713 -7.139,23.713 ccw(c-7.139,21.147) -9.705,21.147 -9.705,7.253 ccw(c-7.139,7.253) -7.139,4.687 7.73,4.687 ccw(c7.73,7.253) 10.295,7.253 10.295,15.363
  pour cut-out: 9.026,24.652 9.026,12.2 15.537,12.2 15.537,24.652
  pour cut-out: -15.507,24.852 -15.507,12.163 -9.707,12.163 -9.707,24.852
  region: -12.212,-4.374

## Silkscreen, mask and mechanical layers (free items; w line width, h text height)
Bottom Overlay:
  text "B+" at -9.907,14.852 h1 r180
  text "B+" at 8.493,14.452 h1 r180
  text "B-" at 3.793,5.652 h1
Top Solder:
  rectangle: -17.8,-11.9 19,-9.9
  text "YB03CQ31552-A" at -8.3,11.8 h1
Bottom Solder:
  text "YB03CQ31552" at 6.548,-20.9 h1
Mechanical 1:
  lines w0.3: -12.247,23.5 ccw(c0,0) 12.247,23.5
Mechanical 10:
  circle w0.013: c0,15.5 r10
  circle w0.025: c0,0 r27
  circle w0.013: c22.5,7.603 r0.916
  circle w0.013: c-22.5,7.603 r0.916
  circle w0.013: c-22.5,-7.603 r0.916
  circle w0.013: c22.5,-7.603 r0.916
  circle w0.006: c19.5,-9.5 r0.003
  circle w0.006: c16.5,-9.5 r0.003
  circle w0.013: c0,15.5 r10
  circle w0.013: c-17.552,-16 r1.1
  circle w0.013: c-17.552,16 r1.1
  circle w0.013: c17.552,16 r1.1
  circle w0.013: c17.552,-16 r1.1
  pour cut-out: 0,15.5
  lines w0.013: -19.05,-8 ccw(c-18.05,-8) -18.05,-9 ; -19.05,12.3 cw(c-18.05,12.3) -18.05,13.3 ; -12.247,23.5 ccw(c0,0) 12.247,23.5 ; -11,15.5 ccw(c0,15.5) 11,15.5 ; -4.6,9.6 ccw(c6.4,9.6) 17.4,9.6 ; 17.95,-9 ccw(c17.95,-8) 18.95,-8 ; 17.95,13.3 cw(c17.95,12.3) 18.95,12.3
  lines w0.15: -24.8,-0.285 -24.8,0 -22.5,0 ; -22.5,-7.603 -22.5,7.603 ; -14.203,14.697 -9.895,19.005 ; -13.905,-19.005 -9.597,-14.697 ; -13.314,-15.586 -10.486,-18.414 ; -13.314,18.414 -10.486,15.586 ; -7.778,7.722 0,15.5 7.778,7.722 ; -0.365,-21.865 0.365,-21.135 ; -0.365,-21.135 0.365,-21.865 ; 9.597,14.697 13.905,19.005 ; 9.895,-19.005 14.203,-14.697 ; 10.486,-15.586 13.314,-18.414 ; 10.486,18.414 13.314,15.586